# Altium PCB AT_START_F426 V1.0.pcbdoc (part 1 of 3)
Units mil, origin at the board's own origin, x right, y up, seen from the top; angles counter-clockwise.
Board outline 4602.43 x 3597.64 mil, 2 copper layers (Top Layer, Bottom Layer); 123 components, 105 nets, 472 pads, 880 vias.
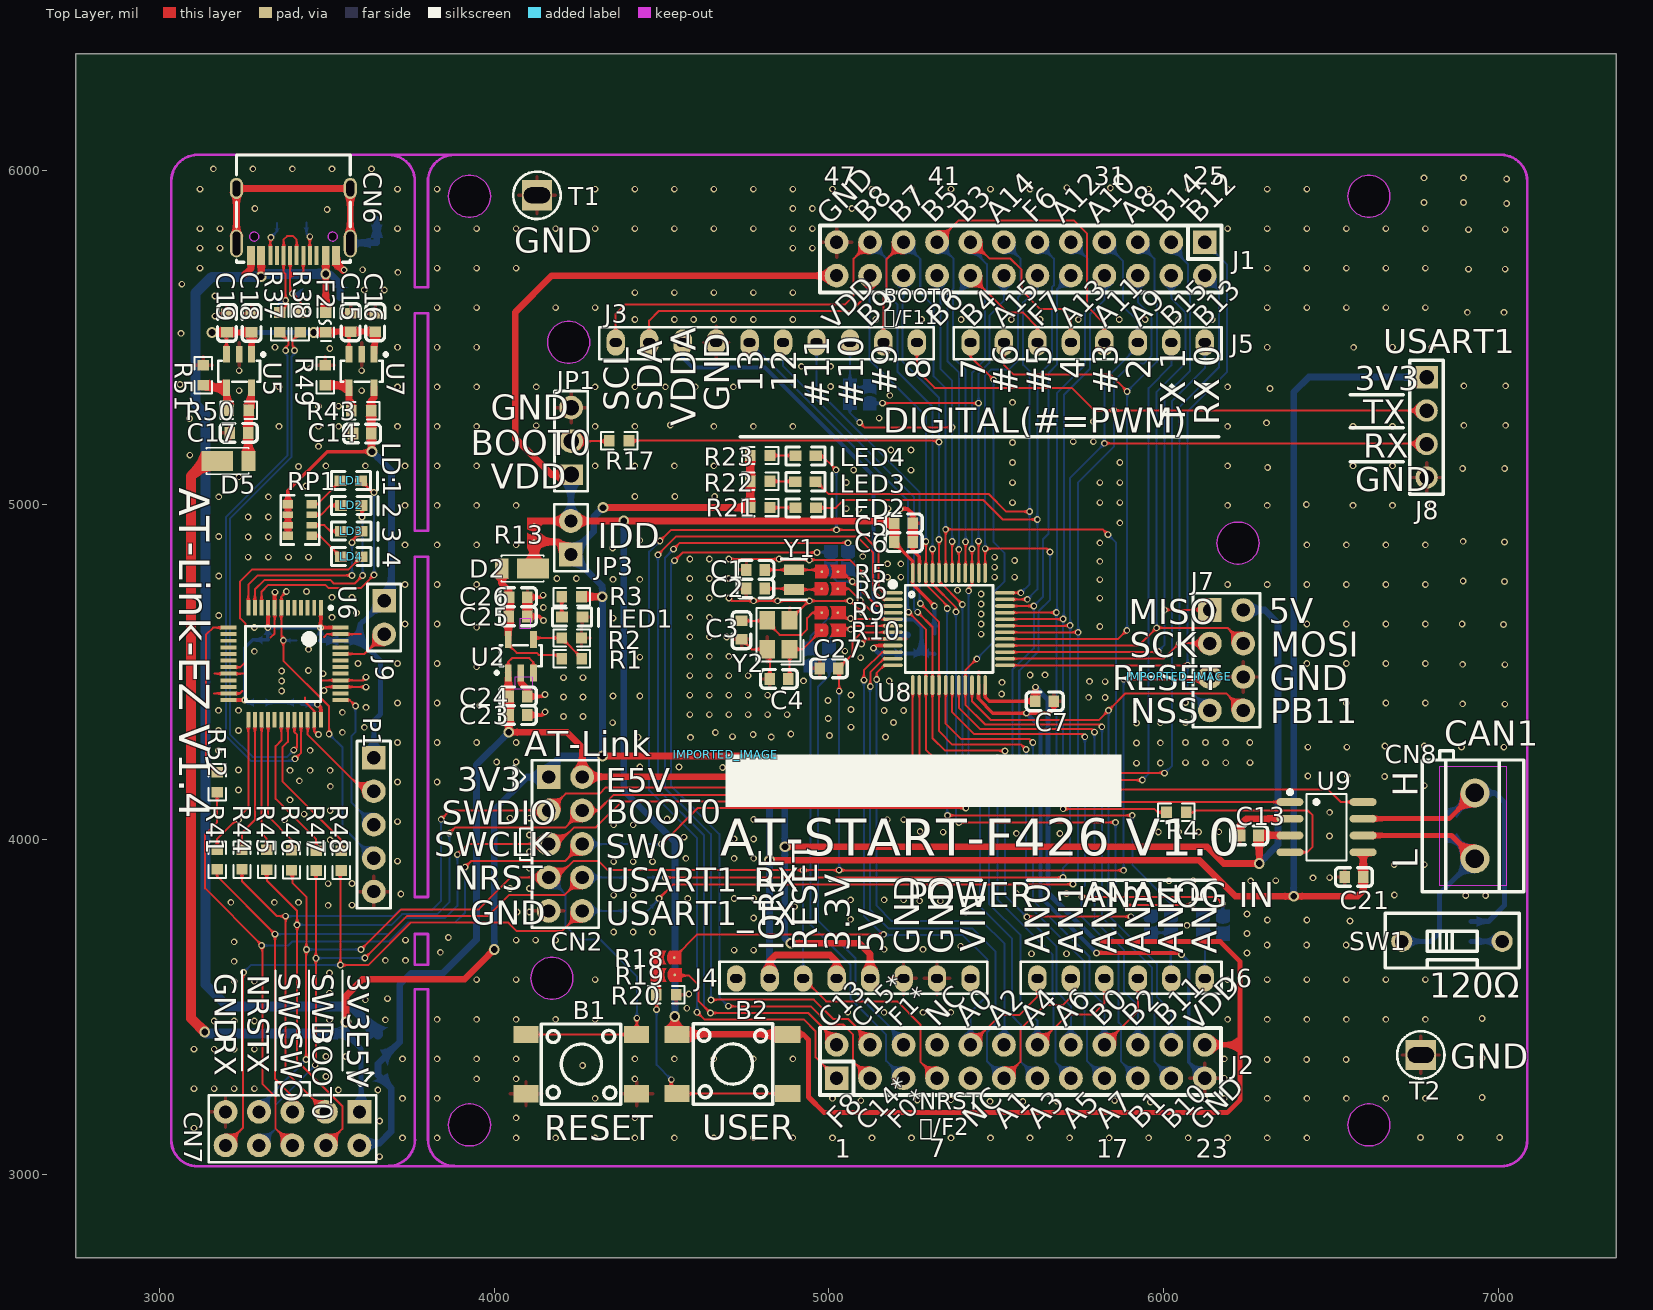
[diagram p0: Top Layer view]
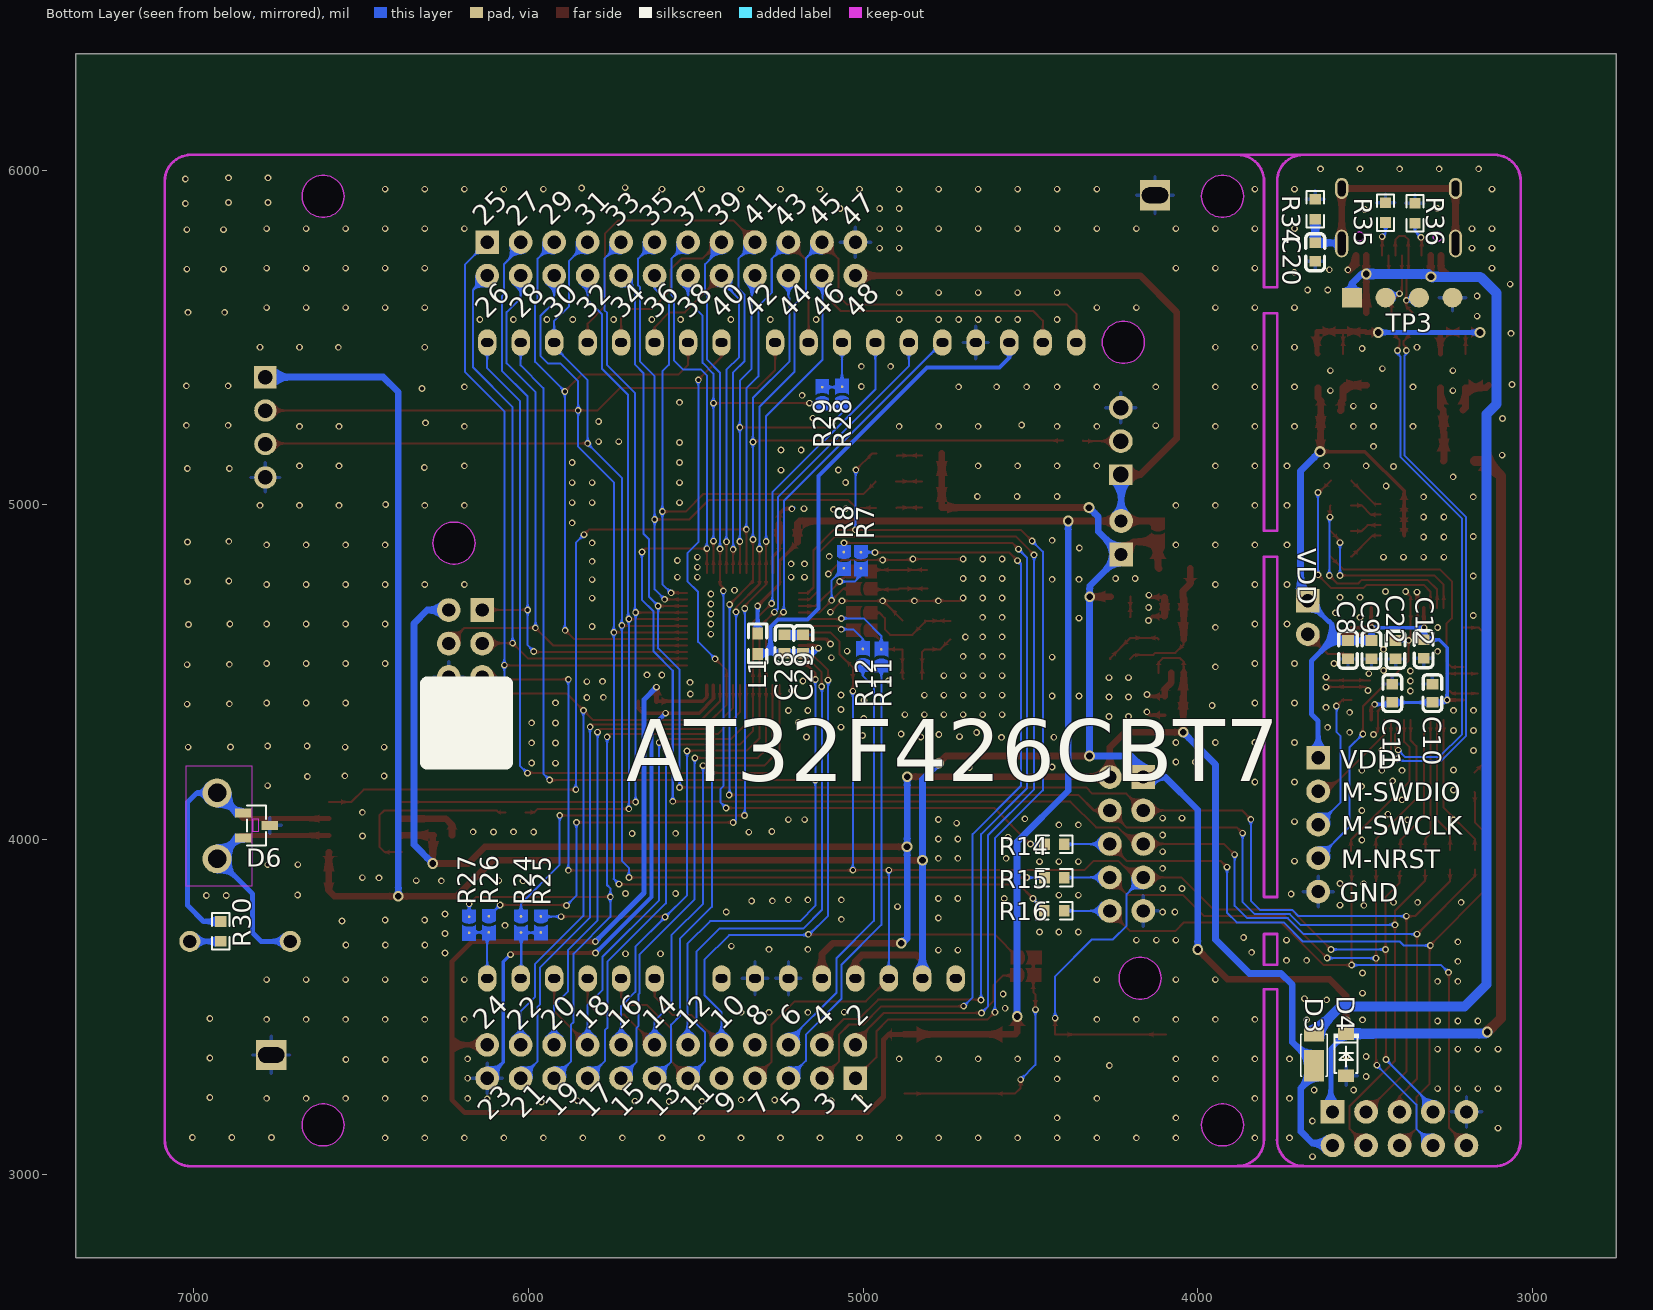
[diagram p1: Bottom Layer view, seen from below]

## Layer stack, top to bottom
Top Layer: signal copper (thickness not stored)
Dielectric: dielectric 12.6, FR-4, Dk 4.8
Bottom Layer: signal copper (thickness not stored)

## Board outline
7352.43,2750 2750,2750 2750,6347.64 7352.43,6347.64
cut-out: 6676.59,5921.94 cw(c6613.59,5921.94) 6550.6,5921.94 cw(c6613.59,5921.94)
cut-out: 6676.59,3147.26 cw(c6613.59,3147.26) 6550.6,3147.26 cw(c6613.59,3147.26)
cut-out: 3989.17,3147.26 cw(c3926.17,3147.26) 3863.18,3147.26 cw(c3926.17,3147.26)
cut-out: 4235.51,3585.63 cw(c4172.52,3585.63) 4109.52,3585.63 cw(c4172.52,3585.63)
cut-out: 6285.51,4885.63 cw(c6222.52,4885.63) 6159.52,4885.63 cw(c6222.52,4885.63)
cut-out: 4285.51,5485.63 cw(c4222.52,5485.63) 4159.52,5485.63 cw(c4222.52,5485.63)
cut-out: 3989.18,5921.94 cw(c3926.19,5921.94) 3863.2,5921.94 cw(c3926.19,5921.94)

## Design rules (kind name [scope] priority, off if disabled: settings)
BoardOutlineClearance copperThickness1oz [All] p0: genericclearance=10 ignorepadtopadclearanceinfootprint=FALSE except(0: Arc-SplitContinuation Track-SplitContinuation SMDPad-SplitContinuation THPad-SplitContinuation Via-SplitContinuation Fill-SplitContinuation Poly-SplitContinuation Region-SplitContinuation Text-SplitContinuation; 6: SMDPad-CutoutEdge THPad-CutoutEdge Via-CutoutEdge Fill-CutoutEdge Region-CutoutEdge; 11.8: Track-OutlineEdge SMDPad-OutlineEdge THPad-OutlineEdge Via-OutlineEdge Fill-OutlineEdge Region-OutlineEdge Poly-OutlineEdge Text-OutlineEdge Track-CutoutEdge)
Clearance copperThickness1oz [(InNet('3V3') OR InNet('PA15') OR InNet('VCC') OR InNet('M-NRST') OR InNet('M-USB_DM') OR InNet('ATLINK_5V') OR InNet('M-USB_DP') OR InNet('USBP') OR InNet('USBM') OR InNet('GND') OR InNet('PB13') OR InNet('PC13') OR InNet('PB12') OR InNet('PB14') OR InNet('PB15') OR InNet('PB6') OR InNet('PB11') OR InNet('PB2') OR InNet('PB1') OR InNet('PF7') OR InNet('PF6') OR InNet('VDD') OR InNet('LD4') OR InNet('ATLK_RX') OR InNet('ATLK_TX') OR InNet('PF1') OR InNet('PF0') OR InNet('PC15') OR InNet('PC14') OR InNet('LD1') OR InNet('LD2') OR InNet('LD3') OR InNet('ATLK_SWCLK') OR InNet('ATLK_SWDIO') OR InNet('ATLK_BOOT0') OR InNet('ATLK_NRST') OR InNet('M-ATLK_TX') OR InNet('M-ATLK_RX') OR InNet('M-SWCLK') OR InNet('M-BOOT0') OR InNet('M-SWDIO') OR InNet('VCC3.5V') OR InNet('ATLK_SWO') OR InNet('$1N792') OR InNet('$1N793') OR InNet('$1N794') OR InNet('$1N795') OR InNet('$2N438') OR InNet('$3N526') OR InNet('$1N16959') OR InNet('PA14/SWCLK') OR InNet('PA13/SWDIO') OR InNet('PF11/BOOT0') OR InNet('NRST/PF2') OR InNet('$1N17598') OR InNet('$1N17675') OR InNet('$2N5975') OR InNet('$2N6210') OR InNet('$2N6248') OR InNet('$2N6104') OR InNet('$2N6111') OR InNet('$2N5937') OR InNet('$2N5955') OR InNet('$3N7356') OR InNet('$3N6624') OR InNet('$3N6989') OR InNet('$3N7005') OR InNet('$3N7010') OR InNet('$3N7265') OR InNet('PA0') OR InNet('$4N2984') OR InNet('$4N3391') OR InNet('$4N3469') OR InNet('PA6') OR InNet('E5V') OR InNet('PA9/USART1_TX') OR InNet('PA10/USART1_RX') OR InNet('PF8') OR InNet('PB10') OR InNet('PA8') OR InNet('PB4') OR InNet('PB5') OR InNet('PA2') OR InNet('PA3') OR InNet('PB0') OR InNet('PA4') OR InNet('PA1') OR InNet('PA5') OR InNet('PA7') OR InNet('CC2') OR InNet('CC1') OR InNet('EGND') OR InNet('$2N7510') OR InNet('SWO') OR InNet('CAN1_RX') OR InNet('CAN1_TX') OR InNet('CAN1_STB') OR InNet('CAN_L') OR InNet('CAN_H') OR InNet('$3N14088') OR InNet('$3N14090') OR InNet('PB3/SWO') OR InNet('VDDA') OR InNet('PB8') OR InNet('PB9'))] p1: gap=7 ignorepadtopadclearanceinfootprint=FALSE except(6: Track-Track Track-SMDPad SMDPad-SMDPad Track-THPad SMDPad-THPad THPad-THPad Track-Via SMDPad-Via THPad-Via Via-Via Track-Fill SMDPad-Fill THPad-Fill Via-Fill Fill-Fill SMDPad-Region THPad-Region Via-Region Fill-Region Region-Region Track-Poly SMDPad-Poly THPad-Poly Via-Poly Fill-Poly Poly-Poly Track-Text SMDPad-Text THPad-Text Via-Text Fill-Text Region-Text Poly-Text Text-Text Track-Hole SMDPad-Hole THPad-Hole Via-Hole Fill-Hole Region-Hole Poly-Hole Text-Hole; 11.8: Track-Region Region-Poly Track-Sheet SMDPad-Sheet THPad-Sheet Via-Sheet Fill-Sheet Region-Sheet Poly-Sheet Text-Sheet Sheet-Hole)
DiffPairsRouting differentialPair [All] p1: maxuncoupledlength=10 minlimit=6 maxlimit=6 mostfreqgap=6 toplayer_minwidth=5 toplayer_prefwidth=10 toplayer_maxwidth=100 bottomlayer_minwidth=5 bottomlayer_prefwidth=10 bottomlayer_maxwidth=100
PasteMaskExpansion pasteMaskExpansion [All] p1: expansion=0
PlaneConnect innerPlane [All] p1: planeconnectstyle=Relief reliefexpansion=20 reliefentries=4 reliefconductorwidth=10 reliefairgap=10
PolygonConnect copperRegion [All] p1: connectstyle=Relief reliefentries=4 reliefconductorwidth=10 polygonreliefangle="90 Angle" airgapwidth=10
RoutingVias viaSize [All] p1: viastyle="Through Hole" holewidth=11.811 minholewidth=11.811 maxholewidth=27.6 width=19.685 minwidth=19.685 maxwidth=39.4
SolderMaskExpansion solderMaskExpansion [All] p1: useseparateexpansions=TRUE expansion=2 expansionbottom=2
Width copperThickness1oz [All] p1: maxlimit=100 minlimit=5 preferedwidth=6

## Components (designator, comment, footprint, x,y, rotation, side; value= is the part's Value field where it differs from the comment)
B1 "TS-1002S-05026C" KEY-SMD_4P-L6.0-W6.0-P4.50-LS9.0 4260.61,3328.92 r0 top
B2 "TSA063G60-250" KEY-SMD_4P-L6.1-W6.1-P4.50-LS9.0 4711.8,3329.27 r180 top
C1 "CL10C180JB8NNNC" C0603 4781.33,4805.82 r0 top
C2 "CL10C180JB8NNNC" C0603 4780.83,4749.73 r0 top
C3 "CL10C150JB8NNNC" C0603 4739.22,4625.76 r90 top
C4 "CL10C150JB8NNNC" C0603 4851.22,4479.76 r0 top
C5 "CL10A475KO8NNNC" C0603 5223.54,4945.1 r180 top
C6 "CC0603KRX7R9BB104" C0603 5223.6,4888.52 r180 top
C7 "CC0603KRX7R9BB104" C0603 5644.8,4413.06 r180 top
C8 "CL10A475KO8NNNC" C0603 3551.17,4567.09 r90 bottom
C9 "CC0603KRX7R9BB104" C0603 3481.17,4567.09 r90 bottom
C10 "CC0603KRX7R9BB104" C0603 3299.17,4437.09 r270 bottom
C11 "CC0603KRX7R9BB104" C0603 3419.17,4437.09 r270 bottom
C12 "CC0603KRX7R9BB104" C0603 3325.17,4569.09 r90 bottom
C13 "CC0603KRX7R9BB104" C0603 6256.18,4012.42 r0 top
C14 "CL10A106KP8NNNC" C0603 3605.78,5212.88 r0 top
C15 "CL10A106KP8NNNC" C0603 3571.35,5545.19 r270 top
C16 "CC0603KRX7R9BB104" C0603 3644.55,5545.23 r270 top
C17 "CL10A106KP8NNNC" C0603 3237.17,5215.09 r0 top
C18 "CL10A106KP8NNNC" C0603 3275.35,5543.19 r270 top
C19 "CC0603KRX7R9BB104" C0603 3201.35,5543.19 r270 top
C20 "CC0603KRX7R9BB104" C0603 3649.17,5755.09 r90 bottom
C21 "CC0603KRX7R9BB104" C0603 6568.99,3888.03 r0 top
C22 "CC0603KRX7R9BB104" C0603 3409.17,4567.09 r90 bottom
C23 "CL10A106KP8NNNC" C0603 4071.22,4371.76 r0 top
C24 "CC0603KRX7R9BB104" C0603 4071.22,4427.76 r0 top
C25 "CL10A106KP8NNNC" C0603 4071.5,4666.93 r0 top
C26 "CC0603KRX7R9BB104" C0603 4071.83,4724.02 r0 top
C27 "CC0603KRX7R9BB104" C0603 5000.74,4511.3 r0 top
C28 "CC0603KRX7R9BB104" C0603 5235.22,4583.76 r270 bottom
C29 "CC0603KRX7R9BB104" C0603 5179.22,4583.76 r270 bottom
CN2 "CON10" HDR2X5 4162.92,4186.8 r270 top
CN6 "TYPEC-304-BCP16" USB-C-SMD_TYPEC-304-BCP16 3400.17,5845.09 r180 top
CN7 "CON10" HDR2X5 3597.35,3186.3 r180 top
CN8 "KF301-5.0-2P" CONN-TH_P5.00_KF301-5.0-2P 6930.22,4040.76 r90 top
D2 "DFLS130L-7" POWERDI-123_L2.8-W1.8-LS3.7-RD 4069.22,4809.76 r180 top
D3 "DFLS130L-7" POWERDI-123_L2.8-W1.8-LS3.7-RD 3653.17,3371.09 r90 bottom
D4 "SMF3.3A_C2759873" SOD-123FL_L2.8-W1.8-LS3.8-RD 3556.87,3357.02 r270 bottom
D5 "DFLS130L-7" POWERDI-123_L2.8-W1.8-LS3.7-RD 3219.17,5131.09 r0 top
D6 "PESD2CANFD24V-TR" SOT-23-3_L2.9-W1.3-P1.90-LS2.4-BR 6812.57,4042.19 r0 bottom
F2 "BSMD0603-050-6V" F0603 3497.17,5545.09 r270 top
IMPORTED_IMAGE "IMPORTED_IMAGE" IMPORTED_IMAGE 6047.11,4485.68 r0 top
IMPORTED_IMAGE "IMPORTED_IMAGE" IMPORTED_IMAGE 4692.26,4253.95 r0 top
J1 "Header 12X2" HEAD2*12 6123.16,5784.77 r180 top
J2 "Header 12X2" HEAD2*12 5023.18,3286.67 r0 top locked
J3 "CON10" "HDR1X10 - 2#" 5263.17,5485.09 r180 top
J4 "CON8" "HDR1X8 - 2#" 4723.17,3585.09 r0 top locked
J5 "CON8" "HDR1X8 - 2#" 6123.17,5485.09 r180 top
J6 "CON6" "HDR1X6 -2#" 5623.17,3585.09 r0 top locked
J7 "Header 4X2" HDR2X4 6138.17,4685.67 r270 top locked
J8 "PZ2.54-1*4-WZ" HDR-TH_4P-P2.54-H-M-W7.7-P 6785.9,5231.76 r270 top
J9 "1X2P_2.54M" HDR1X2 3671.35,4713.3 r270 top
JP1 "2.54-1*3P针" HDR-TH_3P-P2.54-V-M-1 4230.07,5190.22 r90 top
JP3 "1X2P_2.54M" HDR1X2 4229.22,4851.76 r90 top
L1 "BEAD" r0603 5315.22,4615.76 r270 bottom
LD1 "RED" LED0603 3541.39,5072.1 r0 top
LD2 "GREEN" LED0603 3542.35,4998 r0 top
LD3 "BLUE" LED0603 3542.39,4921.1 r0 top
LD4 "YELLOW" LED0603 3542.35,4845.1 r0 top
LED1 "RED" LED0603 4202.47,4664.59 r0 top
LED2 "RED" LED0603 4900.05,4990.82 r0 top
LED3 "YELLOW" LED0603 4899.68,5068.82 r0 top
LED4 "GREEN" LED0603 4899.85,5146.31 r0 top
P1 "Header 5" HDR1X5 3640.35,4244.3 r270 top
R1 "0603WAF5102T5E" R0603 4232.03,4539.95 r0 top
R2 "0603WAF1502T5E" R0603 4231.39,4602.26 r0 top
R3 "0603WAF1001T5E" R0603 4231.22,4725.76 r0 top
R4 "0603WAF3300T5E" R0603 6038.33,4081.41 r0 top
R5 "0603WAF0000T5E" SB-PAD_2 5004.67,4800.3 r0 top
R6 "0603WAF0000T5E" SB-PAD_2 5004.09,4749.24 r0 top
R7 "SB_PAD" SB-PAD_2 5006.57,4833.09 r270 bottom
R8 "SB_PAD" SB-PAD_2 5057.6,4833.53 r270 bottom
R9 "0603WAF0000T5E" SB-PAD_2 5004.26,4677.75 r0 top
R10 "0603WAF0000T5E" SB-PAD_2 5003.74,4625.23 r0 top
R11 "SB_PAD" SB-PAD_2 4945.59,4545.53 r90 bottom
R12 "SB_PAD" SB-PAD_2 5000.69,4547.01 r90 bottom
R13 "0603WAF0000T5E" SB-PAD_2 4119.22,4915.76 r270 top
R14 "0603WAF4700T5E" R0603 4428.32,3986.26 r180 bottom
R15 "0603WAF4700T5E" R0603 4428.35,3886.34 r180 bottom
R16 "0603WAF4700T5E" R0603 4428.71,3787.38 r180 bottom
R17 "0603WAF3301T5E" R0603 4373.22,5191.76 r180 top
R18 "0603WAF0000T5E" SB-PAD_2 4512.42,3647.35 r180 top
R19 "SB_PAD" SB-PAD_2 4513.87,3595.43 r180 top
R20 "0603WAF1003T5E" R0603 4514,3536.64 r0 top
R21 "0603WAF1001T5E" R0603 4794.65,4991.93 r180 top
R22 "0603WAF1001T5E" R0603 4794.65,5069.93 r180 top
R23 "0603WAF1001T5E" R0603 4794.65,5147.41 r180 top
R24 "SB_PAD" SB-PAD_2 6022.23,3744.76 r270 bottom
R25 "0603WAF0000T5E" SB-PAD_2 5962.81,3744.78 r270 bottom
R26 "SB_PAD" SB-PAD_2 6118.34,3745.08 r270 bottom
R27 "0603WAF0000T5E" SB-PAD_2 6177.27,3743.85 r270 bottom
R28 "SB_PAD" SB-PAD_2 5062.86,5330.51 r90 bottom
R29 "0603WAF0000T5E" SB-PAD_2 5122.11,5329.3 r90 bottom
R30 "0603WAF1200T5E" R0603 6919.35,3725.57 r90 bottom
R34 "RC0603FR-071ML" R0603 3649.17,5883.09 r90 bottom
R35 "0603WAF5101T5E" R0603 3439.17,5873.09 r90 bottom
R36 "0603WAF5101T5E" R0603 3351.17,5871.09 r90 bottom
R37 "0603WAF0000T5E" R0603 3359.17,5545.09 r270 top
R38 "0603WAF0000T5E" R0603 3421.17,5545.09 r270 top
R41 "0603WAF330JT5E" R0603 3172.55,3940.34 r270 top
R43 "0603WAF4702T5E" R0603 3603.17,5281.09 r180 top
R44 "0603WAF330JT5E" R0603 3246.55,3940.34 r270 top
R45 "0603WAF330JT5E" R0603 3320.55,3939.34 r270 top
R46 "0603WAF330JT5E" R0603 3394.55,3938.34 r270 top
R47 "0603WAF330JT5E" R0603 3468.55,3937.34 r270 top
R48 "0603WAF330JT5E" R0603 3542.55,3937.34 r270 top
R49 "0603WAF1502T5E" R0603 3495.17,5387.09 r90 top
R50 "0603WAF5102T5E" R0603 3237.17,5283.09 r180 top
R51 "0603WAF1502T5E" R0603 3131.17,5387.09 r90 top
R52 "0603WAF330JT5E" R0603 3173.17,4171.09 r270 top
RP1 "4D03WGJ0102T5E" RES-ARRAY-SMD_0603-8P-L3.2-W1.6-BL 3419.17,4955.09 r270 top
SW1 "DSWB01LHGET" SW-TH_DSWB01LHGET 6861.76,3695.84 r90 top
T1 "Test point" TestPoint 4127.89,5924.85 r0 top
T2 "Test point" TestPoint 6768.79,3356.4 r0 top
TP3 "1X4P_2.54F" "HDR1X4 - TOP" 3539.17,5619.09 r0 bottom
U2 "RT9080N-08GJ5" SOT-23-5 4142.24,4562.73 r90 top
U5 "RT9080N-08GJ5" SOT-23-5 3175.17,5385.09 r270 top
U6 "AT32F403ACCT7" "LQFP48 - 2" 3482.09,4692.3 r270 top locked
U7 "RT9080N-08GJ5" SOT-23-5 3541.17,5385.09 r270 top
U8 "AT32F426CxT7" LQFP-48_L7.0-W7.0-P0.50-LS9.0-BL 5358.8,4628.88 r270 top locked
U9 "MCP2562FD-E/SN" SOIC-8_L4.9-W3.9-P1.27-LS6.0-BL 6486.97,4037.15 r270 top
Y1 "32.768KHz" "XTAL_SOP - FC-12M" 4895.58,4806.06 r270 top
Y2 "CJ13-080001210B20" CRYSTAL-SMD_4P-L3.2-W2.5-BL 4849.22,4611.76 r90 top

## Footprints (in the part's own frame and the unit in brackets; to place one, negate y for a bottom-side part, rotate by r counter-clockwise, add the part's x,y. Pads: shape width x height; smd on the part's side, far side on the other; paste and mask are expansions set on the pad)
C0603 [mm]
  rect 0.8x0.9 smd: 1(-0.7,0) 2(0.7,0)
  silkscreen extent -1.41,-0.71 1.39,0.72
CONN-TH_P5.00_KF301-5.0-2P [mm]
  round 2.2 hole 1.4: 1(-2.5,0) 2(2.5,0)
  silkscreen extent -5,-3.7 5.71,4
CRYSTAL-SMD_4P-L3.2-W2.5-BL [mm]
  rect 1.4x1.2 smd: 1(-1.1,-0.85) 2(1.1,-0.85) 3(1.1,0.85) 4(-1.1,0.85)
  silkscreen extent -2.26,-1.91 2.03,1.68
F0603 [mil]
  rect 31.75x34.02 smd: 1(-29.66,0) 2(29.66,0)
  silkscreen extent -55,-25 55,25
HDR1X2 [mm]
  rect 1.8x1.8 hole 1: 1(0,0)
  round 1.8 hole 1: 2(2.54,0)
  silkscreen extent -1.27,-1.27 3.81,1.27
"HDR1X4 - TOP" [mm]
  rect 1.5x1.5 smd: 1(0,0)
  round 1.5 smd: 2(-2.54,0) 3(-5.08,0) 4(-7.62,0)
HDR1X5 [mm]
  rect 1.8x1.8 hole 1: 1(0,0)
  round 1.8 hole 1: 2(2.54,0) 3(5.08,0) 4(7.62,0) 5(10.16,0)
  silkscreen extent -1.27,-1.27 11.43,1.27
"HDR1X6 -2#" [mm]
  oval 1.4x2 hole 0.65 slot 0.9 at 0 deg: 1(0,0) 2(2.54,0) 3(5.08,0) 4(7.62,0) 5(10.16,0) 6(12.7,0)
  silkscreen extent -1.27,-1.17 13.97,1.27
"HDR1X8 - 2#" [mm]
  oval 1.4x2 hole 0.65 slot 0.9 at 0 deg: 1(0,0) 2(2.54,0) 3(5.08,0) 4(7.62,0) 5(10.16,0) 6(12.7,0) 7(15.24,0) 8(17.78,0)
  silkscreen extent -1.27,-1.17 19.05,1.27
"HDR1X10 - 2#" [mm]
  oval 1.4x2 hole 0.65 slot 0.9 at 0 deg: 1(0,0) 2(2.54,0) 3(5.08,0) 4(7.62,0) 5(10.16,0) 6(12.7,0) 7(15.24,0) 8(17.78,0) 9(20.32,0) 10(22.86,0)
  silkscreen extent -1.27,-1.17 24.1,1.27
HDR2X4 [mm]
  rect 1.8x1.8 hole 1: 1(0,0)
  round 1.8 hole 1: 2(0,2.54) 3(2.54,0) 4(2.54,2.54) 5(5.08,0) 6(5.08,2.54) 7(7.62,0) 8(7.62,2.54)
  silkscreen extent -1.27,-1.27 8.89,3.81
HDR2X5 [mm]
  rect 1.8x1.8 hole 1: 1(0,0)
  round 1.8 hole 1: 2(0,2.54) 3(2.54,0) 4(2.54,2.54) 5(5.08,0) 6(5.08,2.54) 7(7.62,0) 8(7.62,2.54) 9(10.16,0) 10(10.16,2.54)
  silkscreen extent -1.27,-1.27 11.43,3.81
HDR-TH_3P-P2.54-V-M-1 [mm]
  rect 1.575x1.8 hole 1.2: 1(-2.54,0)
  round 1.8 hole 1.2: 2(0,0) 3(2.54,0)
  silkscreen extent -3.81,-1.27 3.81,1.27
HDR-TH_4P-P2.54-H-M-W7.7-P [mm]
  rect 1.7x1.7 hole 1.1: 1(-3.81,0)
  round 1.7 hole 1.1: 2(-1.27,0) 3(1.27,0) 4(3.81,0)
  silkscreen extent -5.09,-1.27 5.09,1.27
HEAD2*12 [mm]
  rect 1.8x1.8 hole 1: 1(0,0)
  round 1.8 hole 1: 2(0,2.54) 3(2.54,0) 4(2.54,2.54) 5(5.08,0) 6(5.08,2.54) 7(7.62,0) 8(7.62,2.54) 9(10.16,0) 10(10.16,2.54) 11(12.7,0) 12(12.7,2.54) 13(15.24,0) 14(15.24,2.54) 15(17.78,0) 16(17.78,2.54) 17(20.32,0) 18(20.32,2.54) 19(22.86,0) 20(22.86,2.54) 21(25.4,0) 22(25.4,2.54) 23(27.94,0) 24(27.94,2.54)
  silkscreen extent -1.27,-1.27 29.19,3.81
IMPORTED_IMAGE [mil]
KEY-SMD_4P-L6.0-W6.0-P4.50-LS9.0 [mm]
  rect 1.9x1.3 smd: 1(-4.2,2.25) 2(4.2,2.25) 3(-4.2,-2.25) 4(4.2,-2.25)
  silkscreen extent -3.05,-3.05 2.98,3.05
KEY-SMD_4P-L6.1-W6.1-P4.50-LS9.0 [mm]
  rect 1.9x1.3 smd: 1(-4.2,2.25) 2(4.2,2.25) 3(-4.2,-2.25) 4(4.2,-2.25)
  silkscreen extent -3.05,-3.05 2.98,3.05
LED0603 [mil]
  rect 36x32 smd: 1(-0.04,0.2) 2(60.96,0.2)
  silkscreen extent -28,-28 110,27
"LQFP48 - 2" [mm]
  rect 1.2x0.3 smd: 1(0,0) 2(0,-0.5) 3(0,-1) 4(0,-1.5) 5(0,-2) 6(0,-2.5) 7(0,-3) 8(0,-3.5) 9(0,-4) 10(0,-4.5) 11(0,-5) 12(0,-5.5) 25(8.5,-5.5) 26(8.5,-5) 27(8.5,-4.5) 28(8.5,-4) 29(8.5,-3.5) 30(8.5,-3) 31(8.5,-2.5) 32(8.5,-2) 33(8.5,-1.5) 34(8.5,-1) 35(8.5,-0.5) 36(8.5,0)
  rect 0.3x1.2 smd: 13(1.5,-7) 14(2,-7) 15(2.5,-7) 16(3,-7) 17(3.5,-7) 18(4,-7) 19(4.5,-7) 20(5,-7) 21(5.5,-7) 22(6,-7) 23(6.5,-7) 24(7,-7) 37(7,1.5) 38(6.5,1.5) 39(6,1.5) 40(5.5,1.5) 41(5,1.5) 42(4.5,1.5) 43(4,1.5) 44(3.5,1.5) 45(3,1.5) 46(2.5,1.5) 47(2,1.5) 48(1.5,1.5)
  silkscreen extent -0.12,-5.71 7.11,0.89
LQFP-48_L7.0-W7.0-P0.50-LS9.0-BL [mm]
  oval 0.27x1.501 smd: 1(-2.751,-4.249) 2(-2.25,-4.249) 3(-1.75,-4.249) 4(-1.25,-4.249) 5(-0.749,-4.249) 6(-0.249,-4.249) 7(0.249,-4.249) 8(0.749,-4.249) 9(1.25,-4.249) 10(1.75,-4.249) 11(2.25,-4.249) 12(2.751,-4.249) 25(2.751,4.249) 26(2.25,4.249) 27(1.75,4.249) 28(1.25,4.249) 29(0.749,4.249) 30(0.249,4.249) 31(-0.249,4.249) 32(-0.749,4.249) 33(-1.25,4.249) 34(-1.75,4.249) 35(-2.25,4.249) 36(-2.751,4.249)
  oval 1.501x0.27 smd: 13(4.249,-2.751) 14(4.249,-2.25) 15(4.249,-1.75) 16(4.249,-1.25) 17(4.249,-0.749) 18(4.249,-0.249) 19(4.249,0.249) 20(4.249,0.749) 21(4.249,1.25) 22(4.249,1.75) 23(4.249,2.25) 24(4.249,2.751) 37(-4.249,2.751) 38(-4.249,2.25) 39(-4.249,1.75) 40(-4.249,1.25) 41(-4.249,0.749) 42(-4.249,0.249) 43(-4.249,-0.249) 44(-4.249,-0.749) 45(-4.249,-1.25) 46(-4.249,-1.75) 47(-4.249,-2.25) 48(-4.249,-2.751)
  silkscreen extent -3.59,-4.46 3.3,3.34
POWERDI-123_L2.8-W1.8-LS3.7-RD [mm]
  rect 2.4x1.5 smd: 1(-1.187,0)
  rect 1.05x1.5 smd: 2(1.187,0)
  silkscreen extent -2,-1 1.2,1
r0603 [mil]
  rect 36x32 smd: 1(-0.04,0.2) 2(60.96,0.2)
  silkscreen extent -28,-27 89,27
R0603 [mil]
  rect 31.75x34.02 smd: 1(-29.66,0) 2(29.66,0)
  silkscreen extent -55,-26 55,26
RES-ARRAY-SMD_0603-8P-L3.2-W1.6-BL [mm]
  rect 0.65x0.8 smd: 1(-1.2,-0.9) 4(1.2,-0.9) 5(1.2,0.9) 8(-1.2,0.9)
  rect 0.5x0.8 smd: 2(-0.4,-0.9) 3(0.4,-0.9) 6(0.4,0.9) 7(-0.4,0.9)
  silkscreen extent -1.87,-1.45 1.87,1.47
SB-PAD_2 [mil]
  round 8 smd: 1(-25.5,0) 2(22.5,0)
  Top Layer region: -46,20 -12,20 -6.82,12.19 -5,3 -5,3 -5,-3 -6.82,-12.19 -12,-20 -12,-20 -46,-20
  Top Layer region: -1,20 3.47,12.03 5.01,3.03 5.01,3.02 5.01,-2.98 3.47,-12.01 -1,-20 -1,-20 46,-20 46,20
SOD-123FL_L2.8-W1.8-LS3.8-RD [mm]
  rect 0.93x1.2 smd: 1(-1.6,0) 2(1.6,0)
  silkscreen extent -1.6,-0.95 1.38,0.95
SOIC-8_L4.9-W3.9-P1.27-LS6.0-BL [mm]
  oval 0.588x2.045 smd: 1(-1.905,-2.772) 2(-0.635,-2.772) 3(0.635,-2.772) 4(1.905,-2.772) 5(1.905,2.772) 6(0.635,2.772) 7(-0.635,2.772) 8(-1.905,2.772)
  silkscreen extent -2.8,-2.92 2.53,1.52
SOT-23-3_L2.9-W1.3-P1.90-LS2.4-BR [mm]
  rect 1.25x0.7 smd: 1(1,-0.95) 2(1,0.95) 3(-1,0)
  silkscreen extent -0.73,-1.53 0.73,1.53
SOT-23-5 [mil]
  rect 50x20 smd: 1(-65,100) 2(-65,63) 3(-65,25) 4(35,25) 5(35,100)
  silkscreen extent -65,1 18,135
SW-TH_DSWB01LHGET [mm]
  round 1.6 hole 1: 1(0,3.81) 2(0,-3.81)
  silkscreen extent -2.02,-5.11 2.13,5.05
TestPoint [mm]
  rect 2.3x2.3 hole 1.2 slot 2 at 0 deg: 1(0,0)
  silkscreen extent -1.8,-1.8 1.8,1.8
USB-C-SMD_TYPEC-304-BCP16 [mil]
  oval 39.4x82.7 hole 23.6 slot 70.9 at 90 deg: 13(-170.1,64.3) 14(170.1,64.3)
  oval 39.4x63 hole 23.6 slot 47.2 at 90 deg: 15(-170.1,-100.3) 16(170.1,-100.3)
  rect 23.6x57.1 smd: A1B12(-127,100.3) A4B9(-96.5,100.3) B1A12(126.8,100.3) B4A9(96.5,100.3)
  rect 11.8x57.1 smd: A5(-49.2,100.3) A6(-9.8,100.3) A7(9.8,100.3) A8(49.2,100.3) B5(68.9,100.3) B6(29.5,100.3) B7(-29.5,100.3) B8(-68.9,100.3)
  Board Outline Layer circle w0.2: c117.3,43.4 r13.8
  Board Outline Layer circle w0.2: c-117.3,43.4 r13.8
  Board Outline Layer region: 103.5,43.4 104.87,49.39 108.7,54.19 114.23,56.85 120.37,56.85 125.9,54.19 129.73,49.39 131.1,43.4 131.1,43.4 129.73,37.41 125.9,32.61 120.37,29.95 114.23,29.95 108.7,32.61 104.87,37.41 103.5,43.4
  Board Outline Layer region: -131.1,43.4 -129.73,49.39 -125.9,54.19 -120.37,56.85 -114.23,56.85 -108.7,54.19 -104.87,49.39 -103.5,43.4 -103.5,43.4 -104.87,37.41 -108.7,32.61 -114.23,29.95 -120.37,29.95 -125.9,32.61 -129.73,37.41 -131.1,43.4
  Multi-Layer board cut-out: 103.5,43.4 104.87,49.39 108.7,54.19 114.23,56.85 120.37,56.85 125.9,54.19 129.73,49.39 131.1,43.4 131.1,43.4 129.73,37.41 125.9,32.61 120.37,29.95 114.23,29.95 108.7,32.61 104.87,37.41 103.5,43.4
  Multi-Layer board cut-out: -131.1,43.4 -129.73,49.39 -125.9,54.19 -120.37,56.85 -114.23,56.85 -108.7,54.19 -104.87,49.39 -103.5,43.4 -103.5,43.4 -104.87,37.41 -108.7,32.61 -114.23,29.95 -120.37,29.95 -125.9,32.61 -129.73,37.41 -131.1,43.4
  silkscreen extent -170,-200 170,120
"XTAL_SOP - FC-12M" [mm]
  rect 0.8x1.5 smd: 1(0,0) 2(1.5,0)
  silkscreen extent -0.81,-0.99 2.29,0.94

## Via types
v1: diameter 20, hole 12, Top Layer to Bottom Layer, 848 vias
v2: diameter 32, hole 20, Top Layer to Bottom Layer, 21 vias
v3: diameter 19.68, hole 11.81, Top Layer to Bottom Layer, 11 vias

## Nets (pads, with @x,y where several pads share a name; then routed paths per layer and width w, separated by ;. In a path a pad name is that pad's centre, name@x,y a point inside that pad or via, vN(x,y) a via of type N, cw(c..) or ccw(c..) an arc to the next point about the centre after c; other vN are vias at no path point)
3V3: C21.2 CN2.1 CN7.1 D2.1 D4.1 D5.1 J4.2 J4.4 J8.1 JP3.1 R3.2 R13.2 R21.2 R22.2 R23.2 U9.5 | length 10889.6
  Top Layer w20: v2(3557.17,3454.67) 3557.17,3533.03 3606.86,3582.71 3911.32,3582.71 v2(4000.31,3671.71) ; D2.1@4115.97,4809.76 4119.22,4813.01 R13.2@4119.22,4893.26 4122.72,4889.76 4191.22,4889.76 JP3.1@4229.22,4851.76 ; R3.2@4260.88,4725.76 4261.28,4725.36 v2(4323.02,4725.36) ; v2(4323.92,4249.86) 4752.59,4249.86 v2(4774.34,4228.11) ; v2(4325.22,4991.76) 4325.38,4991.93 R21.2@4764.99,4991.93 R22.2@4764.99,5069.93 R23.2@4764.99,5153.93 ; v2@4822.49,3937.76 6107.25,3937.76 6214.61,3830.41 6579.64,3830.41 6596.55,3847.32 C21.2@6596.55,3888.03 6596.55,3961.72 U9.5@6596.12,3962.15 ; J4.2@4823.17,3585.09 4823.17,3637.4 4840.89,3655.12 5003.74,3655.12 5023.17,3635.69 J4.4@5023.17,3585.09
  Top Layer w30: v2(3135.17,3425.09) 3094.87,3465.4 3094.87,5086.79 3139.17,5131.09 D5.1@3172.42,5131.09
  Bottom Layer w15: D4.1@3556.87,3420.01 3602.65,3374.23 3602.65,3191.6 CN7.1@3597.35,3186.3
  Bottom Layer w20: D4.1@3556.87,3420.01 3557.17,3420.31 v2(3557.17,3454.67) ; v2(4000.31,3671.71) 4000.31,4088.9 4098.22,4186.8 CN2.1@4162.92,4186.8 4162.92,4213.22 4199.56,4249.86 v2(4323.92,4249.86) 4323.92,4724.47 v2(4323.02,4725.36) 4323.02,4757.96 JP3.1@4229.22,4851.76 4297.22,4919.76 4297.22,4963.76 v2(4325.22,4991.76) ; v2(4774.34,4228.11) 4822.77,4179.68 4822.77,3585.5 J4.2@4823.17,3585.09 ; v2(6388.78,3830.9) 6388.78,5336.3 6434.25,5381.76 J8.1@6785.9,5381.76
  Bottom Layer w30: v2(3135.17,3425.09) 3140.26,3420.01 D4.1@3556.87,3420.01
  other v2: 4822.44,3937.71
$1N792: LD1.1 RP1.8 | length 115.7
  Top Layer w6: RP1.8@3454.61,5002.33 3471.38,5002.33 LD1.1@3541.35,5072.3
$1N793: LD2.1 RP1.7 | length 99
  Top Layer w6: RP1.7@3454.61,4970.84 3482.92,4970.84 3510.28,4998.21 LD2.1@3542.31,4998.21
$1N794: LD3.1 RP1.6 | length 95.2
  Top Layer w6: RP1.6@3454.61,4939.34 3492.92,4939.34 3510.97,4921.3 LD3.1@3542.35,4921.3
$1N795: LD4.1 RP1.5 | length 113.6
  Top Layer w6: RP1.5@3454.61,4907.85 3478.41,4907.85 3540.97,4845.3 LD4.1@3542.31,4845.3
$1N16959: C15.2 C16.2 C18.2 C19.2 F2.2 U5.1 U5.3 U7.1 U7.3 | length 876.6
  Top Layer w6: U5.3@3200.17,5450.09 3200.17,5514.46 C19.2@3200.81,5515.09 ; U7.3@3566.17,5450.09 3566.17,5512.46 C15.2@3571.35,5517.63
  Top Layer w15: v2(3157.17,5515.09) C19.2@3200.81,5515.09 ; C19.2@3201.35,5515.63 C19.2@3200.81,5515.09 ; U5.1@3275.17,5450.09 3275.17,5514.73 C18.2@3274.81,5515.09 ; C18.2@3275.35,5515.63 C18.2@3274.81,5515.09 ; v2(3461.17,5515.09) 3461.51,5515.43 F2.2@3497.17,5515.43 3499.37,5517.63 C15.2@3571.35,5517.63 C16.2@3644.51,5517.63 ; U7.1@3641.17,5450.09 3644.55,5453.47 C16.2@3644.55,5517.67 ; C19.2@3200.81,5515.09 C18.2@3274.81,5515.09
  Bottom Layer w15: v2(3157.17,5515.09) v2(3461.17,5515.09)
$1N17598: R43.2 R49.1 U7.4 | length 146.1
  Top Layer w20: R49.1@3495.17,5357.43 3558.83,5357.43 U7.4@3566.17,5350.09 3566.17,5314.09 3571.17,5309.09 3571.17,5283.43 R43.2@3573.51,5281.09
$1N17675: R50.2 R51.1 U5.4 | length 142.1
  Top Layer w20: R51.1@3131.17,5357.43 3138.51,5350.09 U5.4@3200.17,5350.09 3200.17,5290.43 R50.2@3207.51,5283.09
$2N438: C2.2 R6.1 Y1.2 | length 172.2
  Top Layer w6: C2.2@4808.39,4749.73 4892.85,4749.73 Y1.2@4895.58,4747.01 4976.36,4747.01 R6.1@4978.59,4749.24
$2N5937: R9.2 R11.2 U8.5 | length 354.5
  Top Layer w6: R9.2@5026.76,4677.75 5026.76,4677.11 5043.33,4660.54 v1(5065.09,4660.54) 5067.26,4658.37 U8.5@5191.5,4658.38
  Bottom Layer w6: R11.2@4945.59,4568.03 4945.59,4608.19 4997.94,4660.54 v1(5065.09,4660.54)
$2N5955: R10.2 R12.2 U8.6 | length 278.6
  Top Layer w6: R10.2@5026.24,4625.23 5030.56,4629.55 5063.96,4629.55 v1(5065.43,4628.09) 5076.01,4638.67 U8.6@5191.5,4638.68
  Bottom Layer w6: R12.2@5000.69,4569.51 5000.69,4599.57 5029.21,4628.09 v1(5065.43,4628.09)
$2N5975: C1.2 R5.1 Y1.1 | length 172.8
  Top Layer w6: C1.2@4808.89,4805.82 4895.33,4805.82 Y1.1@4895.58,4806.06 4973.4,4806.06 R5.1@4979.17,4800.3
$2N6104: R5.2 R7.2 U8.3 | length 299.5
  Top Layer w6: R5.2@5027.17,4800.3 5040.56,4800.3 v1(5070.06,4770.8) 5143.09,4697.77 U8.3@5191.5,4697.78
  Bottom Layer w6: R7.2@5006.57,4810.59 5006.57,4788.76 5024.54,4770.8 v1(5070.06,4770.8)
$2N6111: R6.2 R8.2 U8.4 | length 305.7
  Top Layer w6: R6.2@5026.59,4749.24 5059.46,4749.24 v1(5093.92,4714.78) 5130.63,4678.07 U8.4@5191.5,4678.08
  Bottom Layer w6: R8.2@5057.6,4811.03 5093.96,4774.66 v1(5093.92,4714.78)
$2N6210: C3.2 R9.1 Y2.3 | length 308.9
  Top Layer w6: C3.2@4739.22,4653.32 4814.01,4653.32 Y2.3@4815.76,4655.07 4815.76,4649.23 4853.22,4611.76 4919.22,4611.76 4935.22,4627.76 4935.22,4661.76 4951.21,4677.75 R9.1@4978.76,4677.75
$2N6248: C4.2 R10.1 Y2.1 | length 209.4
  Top Layer w6: C4.2@4878.78,4479.76 4882.69,4483.67 Y2.1@4882.69,4568.45 4921.46,4568.45 R10.1@4978.24,4625.23
$2N7510: JP1.2 R17.2 | length 114.1
  Top Layer w6: JP1.2@4230.07,5190.22 4342.02,5190.22 R17.2@4343.56,5191.76
$3N526: LED1.1 R3.1 | length 61.3
  Top Layer w6: R3.1@4201.56,4725.76 4201.56,4665.66 LED1.1@4202.43,4664.79
$3N6624: C25.1 C26.1 D2.2 R1.1 U2.5 | length 414.7
  Top Layer w6: U2.5@4042.24,4597.73 4042.24,4582.74 4067.22,4557.76 4126.76,4557.76 4132.76,4551.76 4190.56,4551.76 R1.1@4202.37,4539.95
  Top Layer w20: D2.2@4022.47,4809.76 4022.47,4764.51 4044.27,4742.71 C26.1@4044.27,4724.02 4042.24,4721.99 U2.5@4042.24,4597.73
$3N6989: LED2.1 R21.1 | length 76.3
  Top Layer w6: R21.1@4824.31,4991.93 4899.37,4991.93 LED2.1@4900.27,4991.03
$3N7005: LED3.1 R22.1 | length 77.5
  Top Layer w6: R22.1@4824.31,5069.93 4900.52,5069.93 LED3.1@4901.42,5069.03
$3N7010: LED4.1 R23.1 | length 75.5
  Top Layer w6: R23.1@4824.31,5147.41 4898.52,5147.41 LED4.1@4899.42,5146.51
$3N7265: R1.2 R2.1 U2.4 | length 173.5
  Top Layer w6: U2.4@4117.24,4597.73 4121.77,4602.26 R2.1@4201.73,4602.26 4261.69,4542.3 R1.2@4261.69,4539.95
$3N7356: B2.1 B2.2 R18.2 R19.2 R20.1 | length 766.6
  Top Layer w6: v1(4485.15,3491.66) 4485.15,3535.82 R20.1@4484.34,3536.64 4491.37,3543.68 R19.2@4491.37,3595.43 4491.37,3645.9 R18.2@4489.92,3647.36 ; v1(4529.54,3282.69) 4529.54,3257.6 B2.2@4546.45,3240.69 B2.1@4877.16,3240.69
  Bottom Layer w6: v1(4485.15,3491.66) 4485.15,3327.08 v1(4529.54,3282.69)
$3N14088: R4.2 U9.4 | length 554.5
  Top Layer w6: R4.2@6067.99,4081.41 6089.87,4081.41 6095.32,4086.86 6431.36,4086.86 6445.37,4072.85 6445.37,3977.86 6429.66,3962.15 U9.4@6377.82,3962.15
$3N14090: R30.1 SW1.2 | length 107.4
  Bottom Layer w15: R30.1@6919.35,3695.91 7026.69,3695.91 SW1.2@7026.76,3695.84
$4N2984: J6.5 R24.2 R25.2 | length 197.2
  Bottom Layer w6: R25.2@5962.81,3722.28 5963.57,3721.52 R24.2@6021.5,3721.52 ; R24.2@6022.23,3722.26 R24.2@6021.5,3721.52 ; J6.5@6023.17,3585.09 6021.5,3586.77 R24.2@6021.5,3721.52
$4N3391: J6.6 R26.2 R27.2 | length 198.9
  Bottom Layer w6: J6.6@6123.17,3585.09 6123.17,3717.74 R26.2@6118.34,3722.58 6176.05,3722.58 R27.2@6177.27,3721.35
$4N3469: J3.3 R28.2 R29.2 | length 194.5
  Bottom Layer w6: R28.2@5062.86,5353.01 5063.17,5353.32 5063.17,5359.82 ; J3.3@5063.17,5485.09 5063.17,5359.82 ; R29.2@5122.11,5351.8 5071.2,5351.8 5063.17,5359.82
ATLINK_5V: CN6.A4B9 CN6.B4A9 D3.2 F2.1 TP3.1 | length 3402
  Top Layer w20: v2(3303.17,5681.09) 3303.67,5681.59 CN6.B4A9@3303.67,5744.79 ; CN6.A4B9@3496.67,5744.79 v2(3496.67,5689.72) 3496.67,5575.25 F2.1@3497.17,5574.75
  Bottom Layer w20: v2@3303.01,5681.43 3303.01,5681.25 v2(3303.17,5681.09) ; v2(3496.67,5689.72) 3510.55,5689.72 3539.17,5661.09 TP3.1@3539.17,5619.1
  Bottom Layer w30: v2(3496.67,5689.72) 3311.3,5689.72 3303.01,5681.43 3156.33,5681.43 3107.17,5632.28 3107.17,5300.94 3137.17,5270.94 3137.17,3567.09 3203.17,3501.09 3573.91,3501.09 3653.17,3421.83 D3.2@3653.17,3417.84
ATLK_BOOT0: R45.1 U6.27 | length 395.7
  Top Layer w6: U6.27@3304.92,4357.66 3304.92,4018.43 3320.35,4003 R45.1@3320.35,3968.3
ATLK_NRST: R46.1 U6.28 | length 419.2
  Top Layer w6: U6.28@3324.61,4357.66 3324.61,4069.17 3394.35,3999.43 R46.1@3394.35,3967.3
ATLK_RX: CN2.10 CN7.10 R16.2 R48.2 | length 2067.5
  Top Layer w6: CN7.10@3197.35,3086.3 3249.17,3138.13 3249.17,3601.09 v1(3251.17,3603.09) ; v1@3540.49,3625.06 3540.49,3905.62 R48.2@3542.55,3907.68 ; v1(3540.54,3625.01) 3623.45,3625.01 3750.56,3752.13 4041.48,3752.13 4066.49,3727.12 4203.24,3727.12 CN2.10@4262.92,3786.8
  Bottom Layer w6: v1(3251.17,3603.09) 3273.09,3625.01 v1(3540.54,3625.01) ; CN2.10@4262.92,3786.8 4398.47,3786.8 R16.2@4399.05,3787.38
ATLK_SWCLK: R41.1 U6.25 | length 427
  Top Layer w6: R41.1@3172.35,3969.3 3172.35,4002.27 3265.55,4095.47 U6.25@3265.55,4357.66
  other v1: 3235.9,4058.69
ATLK_SWDIO: R44.1 U6.26 | length 404.5
  Top Layer w6: R44.1@3246.35,3969.3 3246.35,4019.57 3285.24,4058.46 U6.26@3285.24,4357.66
ATLK_SWO: R52.1 U6.13 | length 502.2
  Top Layer w6: R52.1@3173.17,4200.75 3138.35,4235.58 3138.35,4611.32 3160.27,4633.25 U6.13@3206.5,4633.25
ATLK_TX: CN2.8 CN7.8 R15.2 R47.2 | length 1923.7
  Top Layer w6: v1(3465.4,3325.79) 3467.56,3327.95 v1(3467.56,3645.3) 3467.56,3906.68 R47.2@3468.55,3907.68 ; v1(3613.72,3645.84) 3739.67,3771.79 3982.13,3771.79 4044.18,3833.84 4209.96,3833.84 CN2.8@4262.92,3886.8
  Bottom Layer w6: CN7.8@3297.35,3086.3 3347.35,3136.3 3347.35,3207.74 v1(3465.4,3325.79) ; v1(3467.56,3645.3) 3468.09,3645.84 v1(3613.72,3645.84) ; CN2.8@4262.92,3886.8 4373.82,3886.8 4374.28,3886.34 R15.2@4398.69,3886.34
CAN1_RX: J1.8 R4.1 U8.32 | length 2131.4
  Top Layer w6: U8.32@5526.1,4658.38 5699.34,4658.37 v1(5700.03,4659.06) ; v3(5700.03,4091.4) 5972.39,4091.4 5982.39,4081.41 R4.1@6008.67,4081.41
  Bottom Layer w6: v3(5700.03,4091.4) v1(5700.03,4659.06) 5702.57,4661.6 5702.57,5329.42 5780.29,5407.14 5780.29,5569.02 5823.16,5611.88 J1.8@5823.16,5684.77
CAN1_STB: J1.19 J3.2 U8.43 U9.8 | length 3381.7
  Top Layer w6: J3.2@5163.17,5485.09 5163.17,5623.59 5172.26,5632.68 5172.26,5733.87 J1.19@5223.16,5784.77 ; U8.43@5349,4796.18 v1(5348.99,4926.81) 5818.17,4926.81 v1(5834.22,4910.76) ; v1(5858.43,4149.21) 6492.4,4149.21 6529.46,4112.15 U9.8@6596.12,4112.15
  Bottom Layer w6: J1.19@5223.16,5784.77 5273.06,5734.86 5273.06,5633.74 5312.88,5593.92 5312.88,5384.04 5348.99,5347.93 v1(5348.99,4926.81) ; v1(5834.22,4910.76) 5858.43,4886.56 v1(5858.43,4149.21)
CAN1_TX: J1.9 U8.33 U9.1 | length 2583.5
  Top Layer w6: U8.33@5526.1,4678.08 v1(5679.69,4678.07) ; v3(5679.86,4112.15) U9.1@6377.82,4112.15
  Bottom Layer w6: v3@5679.84,4112.15 5679.84,4677.92 v1(5679.69,4678.07) 5682.22,4680.6 5682.22,5334.74 5764.76,5417.28 5764.76,5573.9 5772.92,5582.06 5772.92,5735.01 J1.9@5723.16,5784.77
CAN_H: CN8.2 D6.1 R30.2 U9.7 | length 996.1
  Top Layer w15: U9.7@6596.12,4062.15 6853.18,4062.15 CN8.2@6930.22,4139.19
  Bottom Layer w15: R30.2@6919.35,3755.23 6970.78,3755.23 7018.26,3802.71 7018.26,4111.91 6990.98,4139.19 CN8.2@6930.22,4139.19
  Bottom Layer w20: D6.1@6851.94,4079.59 6870.62,4079.59 CN8.2@6930.22,4139.19
CAN_L: CN8.1 D6.2 SW1.1 U9.6 | length 841.2
  Top Layer w15: U9.6@6596.12,4012.15 6860.41,4012.15 CN8.1@6930.22,3942.34
  Bottom Layer w15: SW1.1@6726.76,3695.84 6799.36,3695.84 6824.15,3720.63 6824.15,3837.45 6929.04,3942.34 CN8.1@6930.22,3942.34
  Bottom Layer w20: D6.2@6851.94,4004.79 6867.77,4004.79 CN8.1@6930.22,3942.34
CC1: CN6.A5 R35.1 | length 102.9
  Top Layer w6: v1(3449.17,5801.09) 3449.37,5800.89 CN6.A5@3449.37,5744.79
  Bottom Layer w6: R35.1@3439.17,5843.43 3439.17,5811.09 v1(3449.17,5801.09)
CC2: CN6.B5 R36.1 | length 104.9
  Top Layer w6: CN6.B5@3331.27,5744.79 3331.27,5797.19 v1(3333.17,5799.09)
  Bottom Layer w6: v1(3333.17,5799.09) 3351.17,5817.09 R36.1@3351.17,5841.43
E5V: C13.2 C23.1 C24.1 CN2.2 CN7.2 D3.1 J4.5 J7.2 U2.1 U2.3 U9.3 | length 6105.8
  Top Layer w6: U2.1@4042.24,4497.73 4042.24,4530.79 4053.22,4541.76 4105.22,4541.76 4117.24,4529.74 U2.3@4117.24,4497.73
  Top Layer w20: U2.1@4042.24,4497.73 4042.24,4429.18 C24.1@4043.66,4427.76 C23.1@4043.66,4371.76 4043.66,4321.05 v2(4044,4320.7) 4218.05,4320.7 4262.92,4275.83 CN2.2@4262.92,4186.8 4263.8,4187.68 v2(4868.37,4187.68) ; v2(4868.85,3978.31) 6130.14,3978.31 6179.92,3928.53 v2(6286.09,3928.53) 6286.09,4010.07 C13.2@6283.74,4012.42 6377.56,4012.42 U9.3@6377.82,4012.15 ; v2(4885.84,3689.94) 5090.99,3689.94 5123.17,3657.76 J4.5@5123.17,3585.09
  Bottom Layer w20: CN7.2@3597.35,3086.3 3604.14,3093.09 3658.01,3093.09 3692.06,3127.15 3692.06,3257.17 3653.17,3296.06 D3.1@3653.17,3324.34 3653.17,3330.19 3717.49,3394.51 3717.49,3566.04 3751.4,3599.95 3846.2,3599.95 3947.12,3700.87 3947.12,4223.82 v2(4044,4320.7) ; v2(4868.37,4187.68) 4868.37,3705.41 4883.84,3689.94 v2(4885.84,3689.94) ; J7.2@6238.17,4685.67 6302.28,4685.67 6342.22,4645.72 6342.22,3984.67 v2(6286.09,3928.53)
EGND: C20.2 CN6.13 CN6.14 CN6.15 CN6.16 R34.1 | length 819.9
  Top Layer w20: CN6.14@3230.07,5780.79 CN6.16@3230.07,5945.39 CN6.15@3570.27,5945.39 CN6.13@3570.27,5780.79
  Bottom Layer w20: CN6.13@3570.27,5780.79 3572.13,5782.65 C20.2@3649.17,5782.65 R34.1@3649.17,5853.43